# Allegro board POSITIVE_VOLTAGE_REGULATOR_SCH.brd
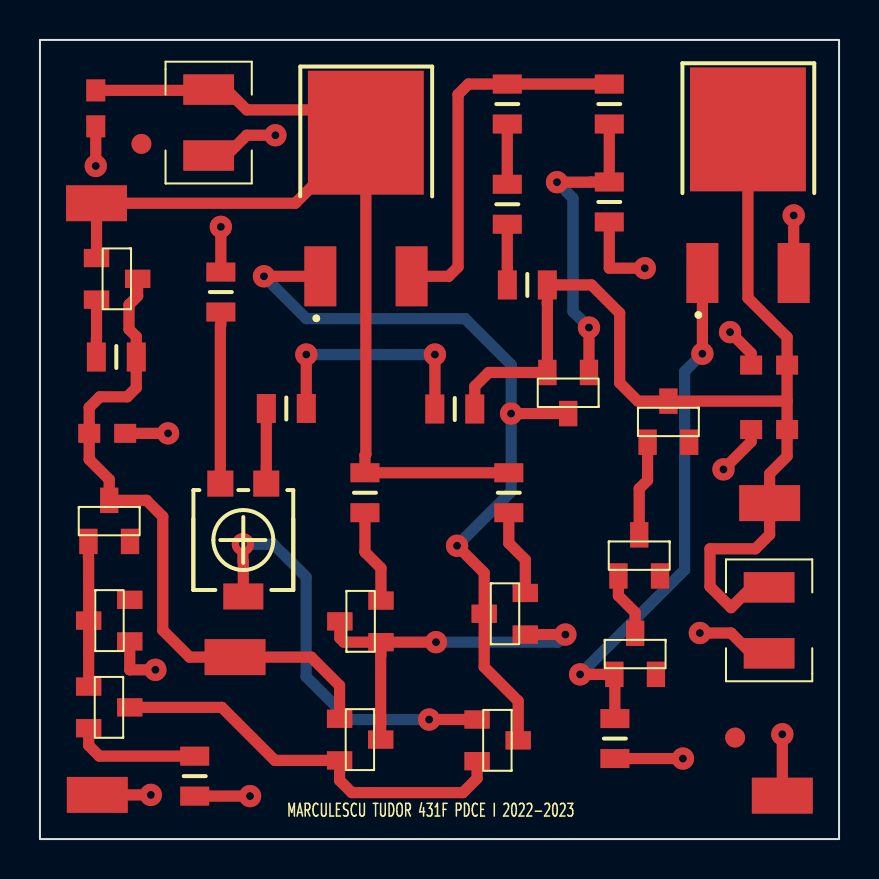
[diagram p0: board, top side]
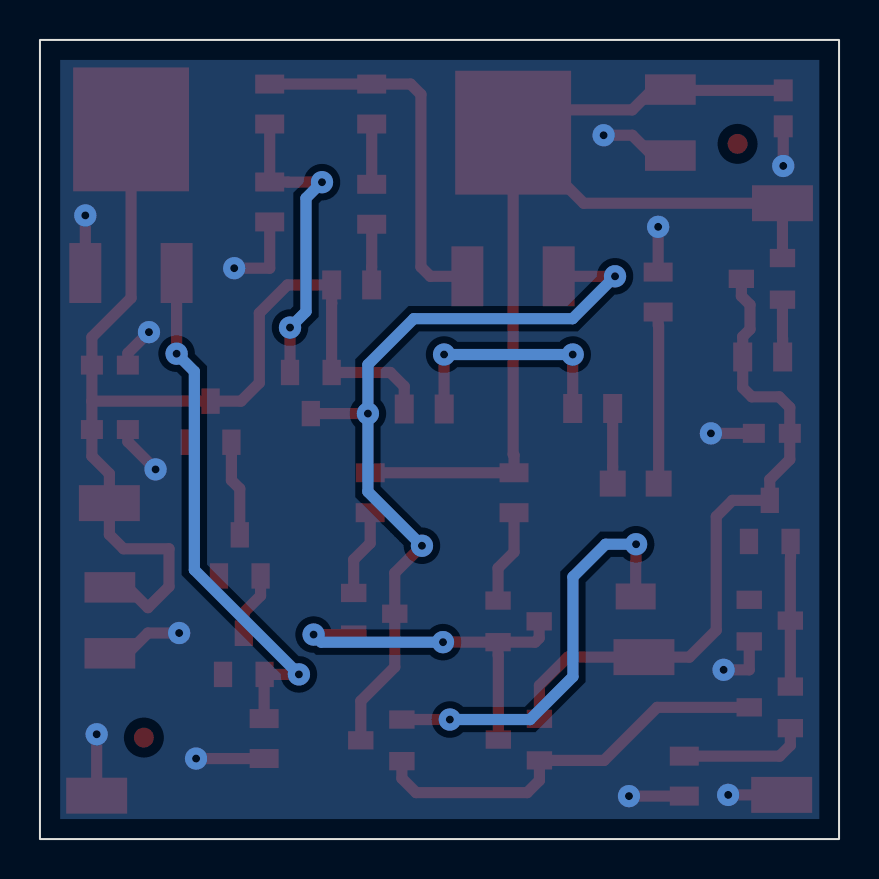
[diagram p1: board, bottom side, seen from below]

Outline 40 x 40 mm; copper layers: TOP, BOTTOM. Coordinates in mm from the lower left corner of the outline.
Outline path: rectangle 0,0 40,40

## Design rules (mm)
nets with their own width: min track width 0.559; nets GND N79013 N79061 N79073 N79079 N79093 N79279 N79431 N79787 N79821 N79851 N79877 N79881 N79991 N80155 N80235 N80249 N80259 N80329 N80335 N796150 N796350 VCC

## Placement (name value [footprint] x y rotation side)
C1  4.7u  [CAPC2008X126N_0805]  2.79 36.58 90 top
C2  4.7u  [CAPC2008X126N_0805]  3.37 20.31 180 top
C3  4.7u  [CAPC2008X126N_0805]  36.5 23.72 0 top
C4  4.7u  [CAPC2008X126N_0805]  36.5 20.5 0 top
D1  BZX84-C5V1  [TO236AB]  2.43 14.9 270 top
D2  BZX84-C2V7  [TO236AB]  4.5 9.89 0 top
D3  BZX84-C10  [TO236AB]  30.42 19.86 270 top
D4  BZX84-C5V1  [TO236AB]  28.96 13.17 270 top
D5  BZX84-C2V7  [TO236AB]  28.75 8.24 270 top
J1  CON2  [1210RF_WV_12D]  8.45 35.86 90 top
J2  CON2  [1210RF_WV_12D]  36.5 10.95 270 top
NOREF  -  [unnamed]  34.8 5.08 0 top
NOREF#2  -  [unnamed]  5.08 34.8 0 top
Q1  JMMBFJ309LT1  [TO236AB]  2.83 29.08 180 top
Q2  QBC807-25  [TO236AB]  17.07 9.86 0 top
Q3  QBC807-25  [TO236AB]  24.3 10.24 0 top
Q4  QBC817-25  [TO236AB]  15 6.02 180 top
Q5  QBC817-25  [TO236AB]  21.88 5.98 180 top
Q6  QBC817-25  [TO236AB]  2.44 7.63 180 top
Q7  QBC817-25  [TO236AB]  27.48 23.36 90 top
Q8  QMJD31C  [DPACK]  33.16 28.33 0 top
Q9  QMJD31C  [DPACK]  14.03 28.17 0 top
R1  150  [RES2012X50N_0805]  3.82 24.13 180 top
R2  500  [RES2012X50N_0805]  7.75 3.15 90 top
R3  1k  [RES2012X50N_0805]  16.27 17.34 90 top
R4  1k  [RES2012X50N_0805]  23.47 17.34 90 top
R5  100  [RES2012X50N_0805]  28.78 5.03 90 top
R6  4.7k  [RES2012X50N_0805]  28.5 36.79 90 top
R7  100k  [RES2012X50N_0805]  28.5 31.89 90 top
R8  10  [RES2012X50N_0805]  23.39 36.79 270 top
R9  10  [RES2012X50N_0805]  23.39 31.78 270 top
R10  1  [RES2012X50N_0805]  24.4 27.74 0 top
R11  15k  [RES2012X50N_0805]  20.76 21.53 0 top
R12  1k  [RES2012X50N_0805]  12.33 21.55 0 top
R13  2K  [TS53YL]  9.03 17.79 90 top
R14  15k  [RES2012X50N_0805]  9.06 27.38 270 top
TP1  TEST POINT  [SMD_PAD_3-05_1-80]  36.53 16.81 0 top
TP2  TEST POINT  [SMD_PAD_3-05_1-80]  37.16 2.17 0 top
TP3  TEST POINT  [SMD_PAD_3-05_1-80]  2.83 31.83 0 top
TP4  TEST POINT  [SMD_PAD_3-05_1-80]  2.87 2.21 0 top
TP5  TEST POINT  [SMD_PAD_3-05_1-80]  9.77 9.11 0 top

## Library data of the parts
C1-C4 = C
D1 D4 = BZX84-C5V1_0
D2 D5 = BZX84-C2V7_0
D3 = BZX84-C10_0
J1 J2 = CON2
Q1 = JMMBFJ309LT1_0
Q2 Q3 = QBC807-25_0
Q4-Q7 = QBC817-25_1
Q8 Q9 = QMJD31C_0
R1-R12 R14 = R
R13 = POT_0
TP1-TP5 = TEST POINT

## Footprints (pads in the part's own frame, mm; a bottom-side part is the same pattern mirrored in y, then rotated)
1210RF_WV_12D
  rect 1.524x2.54 smd: 1(-1.651,0) 2(1.651,0)
CAPC2008X126N_0805
  rect 1.1x0.95 smd: 1(-0.9,0) 2(0.9,0)
DPACK
  rect 1.6x3 smd: 1(0,0) 3(4.57,0)
  rect 5.8x6.2 smd: 2(2.28,7.19)
RES2012X50N_0805
  rect 0.95x1.45 smd: 1(-1,0) 2(1,0)
SMD_PAD_3-05_1-80
  rect 3.05x1.8 smd: 1(0,0)
TO236AB
  rect 1.27x0.914 smd: 1(0,0) 2(0,2.083) 3(-2.057,1.041)
TS53YL
  rect 1.3x1.3 smd: 1(0,0) 3(0,-2.3)
  rect 1.3x2 smd: 2(-5.65,-1.15)
unnamed
  round 1 smd: (0,0)

## Nets
GND: C1.1 C2.1 C3.1 C4.1 D2.1 J1.1 J2.2 Q8.3(E) R2.1 R5.1 R7.1 R14.1 TP2.1 TP4.1
VCC: C1.2 J1.2 Q1.1(D) Q9.2(C) R3.2 R4.2 TP3.1
N79013: Q7.1(B) R6.1 R7.2
N79061: C3.2 C4.2 D3.3 J2.1 Q7.2(E) Q8.2(C) R10.2 R11.2 TP1.1
N79073: Q3.3(C) Q5.3(C) Q7.3(C) Q9.1(B)
N79079: Q3.2(E) R4.1
N79093: C2.2 D1.3 Q1.3(G) Q4.1(B) R1.1 TP5.1
N79279: Q9.3(E) R6.2 R8.1
N79431: Q4.2(E) Q5.2(E) Q6.3(C)
N79787: Q1.2(S) R1.2
N79821: R13.1 R14.2
N79851: Q5.1(B) R13.2
N79877: D1.1 D2.3 Q6.1(B)
N79881: Q2.1(B) Q2.3(C) Q3.1(B) Q4.3(C)
N79991: D5.1 Q8.1(B) R5.2
N80155: Q6.2(E) R2.2
N80235: Q2.2(E) R3.1
N80249: R11.1 R12.2
N80259: R12.1 R13.3
N80329: D3.1 D4.3
N80335: D4.1 D5.3
N796150: R8.2 R9.1
N796350: R9.2 R10.1

Pads without a net: D1 2; D2 2; D3 2; D4 2; D5 2

## Via types
v1: diameter 1.118, hole 0.4, TOP to BOTTOM, 27 vias

## Routing (per net, layer and track width the routed paths; a pad name or vN(x,y) marks a point on that pad's centre or on a via; arc(x,y) is an arc through that point)
GND: length 40.3
  TOP w0.559: C2.1 v1(6.41,20.31) ; v1(30.28,28.57) 28.5,28.57 R7.1 ; v1(33.03,10.31) 34.59,10.31 35.61,9.3 J2.2 ; v1(34.54,25.37) 35.6,24.32 C3.1 ; C1.1 v1(2.79,33.69) ; C4.1 35.6,19.89 v1(34.21,18.5) ; Q8.3 v1(37.73,31.22) ; R14.1 v1(9.06,30.65) ; v1(11.79,35.23) 10.35,35.23 9.33,34.21 J1.1 ; D2.1 4.5,8.47 v1(5.78,8.47) ; R2.1 v1(10.52,2.15) ; TP4.1 v1(5.55,2.21) ; R5.1 v1(32.19,4.03) ; TP2.1 v1(37.16,5.25)
VCC: length 56.1
  TOP w0.559: Q9.2 15.17,36.5 10.35,36.5 9.33,37.52 J1.2 ; Q9.2 16.31,19.26 16.27,19.22 R3.2 R4.2 ; Q9.2 12.78,31.83 TP3.1 Q1.1 ; C1.2 8.23,37.48
N79013: length 15.7
  TOP w0.127: 27.58,32.89 27.58,32.88
  TOP w0.559: 27.58,32.89 R7.2 R6.1 ; Q7.1 v1(27.48,25.6) ; 27.58,32.88 v1(25.88,32.88)
  BOTTOM w0.559: v1(25.88,32.88) 26.68,32.08 26.68,26.4 v1(27.48,25.6)
N79061: length 56.3
  TOP w0.559: Q8.2 35.44,27.08 37.4,25.12 C3.2 37.4,21.92 ; J2.1 35.61,12.6 34.59,11.58 33.54,12.64 33.54,14.53 35.81,14.53 36.53,15.24 TP1.1 36.53,18.29 37.4,19.16 C4.2 37.4,21.92 ; 37.4,21.92 D3.3 29.93,21.92 29.02,22.83 29.02,26.33 27.61,27.74 R10.2 25.4,26.82 25.4,26.82 Q7.2 22.46,23.36 21.76,22.66 R11.2
N79073: length 41.1
  TOP w0.559: v1(20.88,14.68) 22.24,13.32 Q3.3 22.24,8.61 23.94,6.91 Q5.3 ; v1(23.58,21.3) Q7.3 ; Q9.1 v1(11.21,28.17)
  BOTTOM w0.559: v1(11.21,28.17) 13.34,26.05 21.29,26.05 23.58,23.75 v1(23.58,21.3) 23.58,17.39 v1(20.88,14.68)
N79079: length 4.4
  TOP w0.559: Q3.2 24.3,13.98 23.47,14.81 R4.1
N79093: length 34
  TOP w0.559: Q4.1 15,7.68 13.58,9.11 TP5.1 7.49,9.11 6.15,10.45 6.15,16.14 5.33,16.95 D1.3 3.47,18 2.47,19 C2.2 2.47,21.6 3,22.14 4.37,22.14 4.82,22.59 R1.1 4.82,25.15 4.46,25.51 4.46,26.75 4.89,27.18 Q1.3
N79279: length 18.9
  TOP w0.559: Q9.3 20.46,28.17 20.93,28.64 20.93,37.27 21.45,37.79 R8.1 R6.2
N79431: length 20.9
  TOP w0.559: Q5.2 21.88,3.04 21.17,2.32 15.61,2.32 15,2.93 Q4.2 11.76,3.94 9.11,6.59 Q6.3
N79787: length 2.9
  TOP w0.127: 2.82,25.05 2.83,25.05
  TOP w0.559: R1.2 2.82,25.05 ; 2.83,25.05 Q1.2
N79821: length 8.6
  TOP w0.127: 9.06,25.72 9.03,25.72
  TOP w0.559: R14.2 9.06,25.72 ; 9.03,25.72 R13.1
N79851: length 20.9
  TOP w0.127: 10.16,13.91 10.18,13.91
  TOP w0.559: 10.18,13.91 R13.2 ; v1(10.16,14.76) 10.16,13.91 ; Q5.1 v1(19.48,5.98)
  BOTTOM w0.559: v1(19.48,5.98) 15.47,5.98 13.32,8.13 13.32,13.12 11.68,14.76 v1(10.16,14.76)
N79877: length 7.3
  TOP w0.127: 2.43,14.07 2.44,14.07
  TOP w0.559: D1.1 2.43,14.07 ; Q6.1 D2.3 2.44,14.07
N79881: length 19.3
  TOP w0.127: 17.07,9.21 17.06,9.21
  TOP w0.559: v1(26.3,10.24) Q3.1 ; Q2.3 15.01,10.06 15.21,9.86 Q2.1 ; Q2.1 v1(19.82,9.86) ; Q2.1 17.07,9.21 ; 17.06,9.21 Q4.3
  BOTTOM w0.559: v1(19.82,9.86) 25.92,9.86 v1(26.3,10.24)
N79991: length 26.6
  TOP w0.559: v1(33.16,24.3) Q8.1 ; v1(27.04,8.24) D5.1 28.78,8.22 R5.2
  BOTTOM w0.559: v1(33.16,24.3) 32.27,23.41 32.27,13.47 v1(27.04,8.24)
N80155: length 6.4
  TOP w0.559: Q6.2 2.44,4.69 2.98,4.15 R2.2
N80235: length 4.7
  TOP w0.559: R3.1 16.27,14.36 17.07,13.56 Q2.2
N80249: length 11.9
  TOP w0.559: R11.1 19.77,21.53 v1(19.77,24.25) ; R12.2 v1(13.33,24.25)
  BOTTOM w0.559: v1(13.33,24.25) v1(19.77,24.25)
N80259: length 3.8
  TOP w0.127: 11.33,18.63 11.33,18.63
  TOP w0.559: 11.33,18.63 R12.1 ; R13.3 11.33,18.63
N80329: length 4.8
  TOP w0.559: D3.1 30.42,17.96 30,17.54 D4.3
N80335: length 3.2
  TOP w0.559: D4.1 28.96,12.18 29.79,11.34 D5.3
N796150: length 3
  TOP w0.559: R8.2 R9.1
N796350: length 3
  TOP w0.127: 23.4,28.65 23.39,28.65
  TOP w0.559: R10.1 23.4,28.65 ; 23.39,28.65 R9.2

## Copper pours and planes (outline as drawn; the poured copper is in the pictures)
GND on BOTTOM: 0.99,1 0.99,39 38.99,39 38.99,1

## Text on the board
Ref Des/Silkscreen Top: MARCULESCU TUDOR 431F PDCE I 2022-2023
XSECTION_CHART: *  SURFACE - AIR 0 MIL | L1: TOP CONDUCTOR - COPPER 0.709 MIL | *  DIELECTRIC - FR-4 57.638 MIL | L2: BOTTOM CONDUCTOR - COPPER 0.709 MIL | DESIGN CROSS SECTION CHART | ___________________________ | TOTAL THICKNESS 59.056 MIL | 1-2
DISPLAY_TOP: FIGURE | SIZE | 15.74 | DRILL CHART: TOP to BOTTOM | ALL UNITS ARE IN MILS | PLATED | QTY | 26
